# Altium PCB Bucaneve_single_board.PcbDoc (part 2 of 2)
Units mm, origin at the board's own origin, x right, y up, seen from the top; angles counter-clockwise.
Board outline 64 x 64 mm, 4 copper layers (Top Layer, Mid-Layer 1, Mid-Layer 2, Bottom Layer), stack 2.772 mm thick; 84 components, 52 nets, 236 pads, 132 vias.
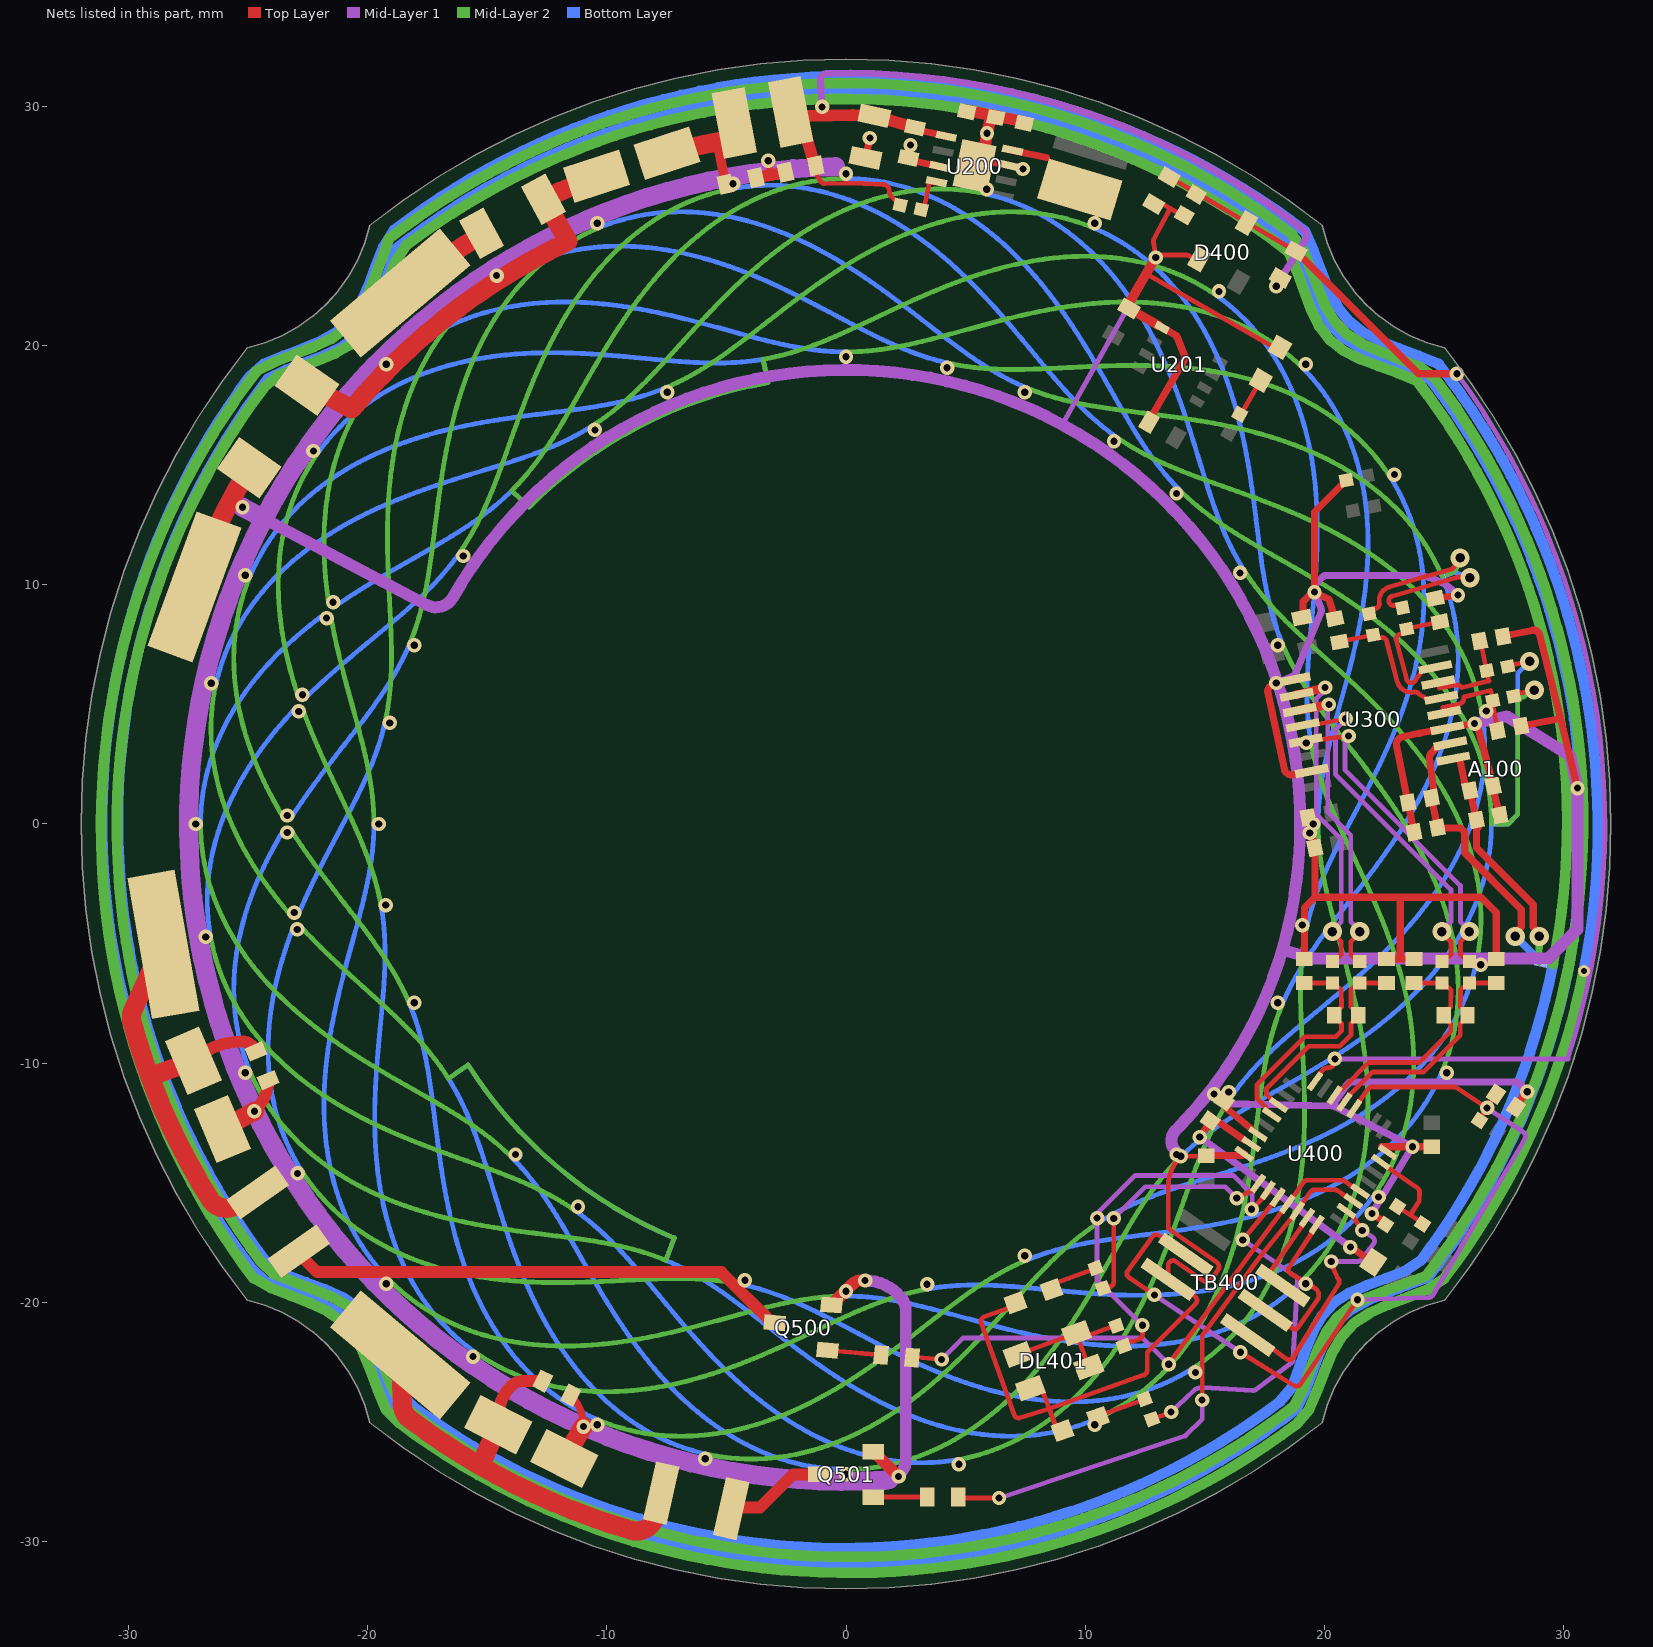
[diagram p4: the nets of this part, all layers, seen from the top]

## Via types
v1: diameter 0.6, hole 0.3, Mid-Layer 2 to Bottom Layer, tented both sides, 66 vias
v2: diameter 0.6, hole 0.3, Top Layer to Mid-Layer 1, tented both sides, 54 vias
v3: diameter 0.8, hole 0.4, Top Layer to Bottom Layer, tented both sides, 6 vias
v4: diameter 0.8, hole 0.4, Top Layer to Mid-Layer 1, tented both sides, 4 vias
v5: diameter 0.5, hole 0.25, Mid-Layer 2 to Bottom Layer, tented both sides, 1 vias
v6: diameter 0.6, hole 0.3, Top Layer to Mid-Layer 1, 1 vias

## Nets (pads, with @x,y where several pads share a name; then routed paths per layer and width w, separated by ;. In a path a pad name is that pad's centre, name@x,y a point inside that pad or via, vN(x,y) a via of type N, cw(c..) or ccw(c..) an arc to the next point about the centre after c; other vN are vias at no path point) (continued)
BOOT0: R400.1 R402.2 U400.31 | length 4.4
  Top Layer w0.2: U400.31@22.371,-14.139 22.632,-14.341 23.91,-15.236 cw(c23.795,-15.4) 23.995,-15.408 ; R402.2@23.075,-16.001 23.219,-16.1 23.604,-16.357 ; 23.995,-15.409 23.978,-15.786 23.604,-16.357 ; R400.1@24.125,-16.726 23.989,-16.615 23.604,-16.357
Buck_SW: L200.1 U200.8 | length 1.4
  Top Layer w0.3: U200.8@6.971,28.185 8.376,27.886
Buck_Vin: C201.1 C202.1 C203.1 L201.2 R200.2 R406.2 U200.1 | length 39.5
  Top Layer w0.2: C201.1@-1.264,27.428 -1.241,27.233 ccw(c-0.445,27.428) -1.024,26.849 ccw(c-0.875,26.998) -0.868,26.787 cw(c0.028,2.795) 1.548,26.756 cw(c1.53,26.472) 1.549,26.756 cw(c1.53,26.472) 1.814,26.472 ccw(c2.134,26.472) 1.814,26.471 ccw(c2.134,26.472) 1.907,26.246 R200.2@2.26,25.894
  Top Layer w0.3: C203.1@2.914,29.047 U200.1@4.193,28.775
  Top Layer w0.5: L201.2@-2.463,29.552 cw(c0,0) C202.1@1.187,29.63 C203.1@2.885,29.136 ; L201.2@-2.316,29.789 -2.179,29.574 -1.655,28.746 -1.344,27.671 C201.1@-1.264,27.535 C201.1@-1.264,27.428
  Mid-Layer 1 w0.3: v2(-1,30) -1.073,31.082 -1.073,31.084 cw(c-0.773,31.103) -1.073,31.103 cw(c-0.773,31.103) -0.782,31.402 cw(c-0.001,0.154) 19.157,24.854 cw(c18.972,24.617) 19.227,24.459 v2(18,22.5)
COS_FILT_N: C303.1 C306.1 R302.2 U400.6 | length 9.6
  Top Layer w0.2: U400.6@20.442,-11.341 20.442,-11.333 20.679,-11.097 20.752,-11.097 21.876,-9.973 23.998,-9.973 25.3,-8.671 25.3,-8.35 25,-8.05 C303.1@25,-8 25,-7.95 25.3,-7.65 25.3,-7.257 25.305,-7.252 25.305,-6.942 25.188,-6.825 25.107,-6.825 R302.2@24.932,-6.65 ; C306.1@23.761,-6.65 R302.2@24.932,-6.65
COS_FILT_P: C303.2 C305.1 R300.2 U400.5 | length 9.8
  Top Layer w0.2: U400.5@20.852,-11.628 20.852,-11.562 22.041,-10.373 24.164,-10.373 25.7,-8.837 25.7,-8.35 26,-8.05 C303.2@26,-8 26,-7.95 25.7,-7.65 25.7,-7.423 25.705,-7.418 25.705,-6.942 25.822,-6.825 25.904,-6.825 R300.2@26.079,-6.65 ; R300.2@26.079,-6.65 C305.1@27.2,-6.65
COS_N: R302.1 U300.12 | length 14.6
  Top Layer w0.2: U300.12@19.111,4.133 19.717,4.174 v2(20.9,4.4) ; R302.1@24.932,-5.75 25.107,-5.575 25.188,-5.575 25.305,-5.458 25.305,-4.917 24.932,-4.544 v4(24.932,-4.5)
  Mid-Layer 1 w0.2: v2(20.9,4.4) 20.9,4.366 20.477,3.943 20.477,2.087 25.305,-2.742 25.305,-4.083 24.932,-4.456 v4(24.932,-4.5)
COS_P: R300.1 U300.13 | length 13.8
  Top Layer w0.2: U300.13@19.238,3.495 19.843,3.537 v2(21.025,3.684) ; R300.1@26.079,-5.75 25.904,-5.575 25.822,-5.575 25.705,-5.458 25.705,-4.917 26.079,-4.544 v4(26.079,-4.5)
  Mid-Layer 1 w0.2: v2(21.025,3.684) 21.025,3.576 20.877,3.427 20.877,2.253 25.705,-2.576 25.705,-4.083 26.079,-4.456 v4(26.079,-4.5)
DBG_LED1: R404.2 U400.19 | length 16
  Top Layer w0.2: R404.2@11.619,-21.842 11.765,-21.731 12.268,-21.548 ; 12.269,-21.548 ccw(c12.2,-21.36) 12.4,-21.36 v2(12.4,-20.973) ; v2(16.97,-16.116) 17.649,-15.437 U400.19@17.649,-15.33
  Mid-Layer 1 w0.2: v2(12.4,-20.973) 10.5,-19.073 10.5,-16.3 12.1,-14.7 16.2,-14.7 17,-15.5 17,-16.085 v2(16.97,-16.116)
DBG_LED2: R405.2 U400.18 | length 10.2
  Top Layer w0.2: R405.2@10.754,-19.423 10.931,-19.398 11.068,-19.348 ; 11.069,-19.348 ccw(c11,-19.16) 11.2,-19.16 v2(11.2,-16.5) ; v2(16.347,-15.653) 17.029,-15.299 U400.18@17.239,-15.043
  Mid-Layer 1 w0.2: v2(11.2,-16.5) 12.527,-15.173 15.867,-15.173 v2(16.347,-15.653)
ERR_LED: R403.2 U400.20 | length 15.3
  Top Layer w0.2: R403.2@12.8,-24.9 12.962,-24.832 v2(13.6,-24.6) ; v2(16.6,-17.4) 17.377,-16.45 17.848,-15.873 U400.20@18.058,-15.617
  Mid-Layer 1 w0.2: v2(13.6,-24.6) 14.539,-23.716 cw(c14.9,-24.1) 14.931,-23.574 17.027,-23.696 ; v2(16.6,-17.4) 18.808,-18.936 cw(c18.694,-19.1) 18.894,-19.111 18.705,-22.407 cw(c18.506,-22.396) 18.626,-22.556 17.159,-23.656 cw(c17.039,-23.496) 17.028,-23.696
GND: C200.2 C201.2 C202.2 C203.2 C204.2 C205.2 C206.2 C207.2 C208.2 C300.2 C301.2 C302.2 C305.2 C306.2 C307.2 C308.2 C309.2 C310.2 C311.2 C312.2 C313.2 C314.2 C315.2 C316.2 C400.2 C401.2 C402.2 C403.2 C404.2 C500.2 C501.2 D201.2 D400.1 D500.2 D501.2 DL200.1 DL400.1 DL401.1 DL402.1 Q500.2 Q501.2 R309.1 R402.1 R407.1 TB400.5 TP101.1 U200.3 U200.7 U200.9 U201.5 U201.9 U300.3 U300.9 U300.15 U400.14 U400.16 U400.32 U400.33 | length 374.5
  Top Layer w0.2: DL402.1@7.085,-20.024 6.842,-20.232 5.782,-20.618 ccw(c5.85,-20.806) 5.662,-20.872 7.035,-24.719 ccw(c7.224,-24.651) 7.283,-24.842 8.5,-24.458 ; DL401.1@7.711,-23.604 8.236,-23.732 8.5,-24.458 ; DL400.1@9.048,-25.374 8.765,-25.184 8.5,-24.458 ; 12.564,23.021 17.848,19.97 DL200.1@18.15,19.943 ; R407.1@12.875,25.937 13.228,25.949 13.57,25.752 ; 12.883,24.484 ccw(c13.059,24.389) 12.861,24.362 v6(12.956,23.7) cw(c13.13,23.6) 13.129,23.8 14.246,23.8 cw(c14.246,23.6) 14.346,23.773 ; 12.883,24.485 13.57,25.752 ; TB400.5@13.775,-19.344 TB400.5@13.48,-19.048 ; C404.2@14.15,25.467 13.912,25.555 13.57,25.752 ; 14.346,23.773 14.537,23.663 D400.1@14.777,23.629 ; C402.2@15.075,-13.875 14.825,-13.898 v2(14.008,-13.898) ccw(c15.282,-15.173) 13.48,-15.173 13.48,-16.811 ccw(c13.68,-16.811) 13.564,-16.975 15.506,-18.334 cw(c15.375,-18.52) 15.561,-18.65 15.275,-19.06 cw(c15.089,-18.93) 14.958,-19.115 13.794,-18.3 ccw(c13.68,-18.464) 13.48,-18.464 TB400.5@13.48,-19.048 ; C401.2@15.812,-11.59 C401.2@15.902,-11.898 ; U400.14@16.979,-12.774 U400.14@17.235,-12.984 ; 8.5,-24.458 12.467,-23.047 ccw(c12.4,-22.859) 12.6,-22.859 12.6,-22.183 cw(c12.8,-22.183) 12.659,-22.041 14.625,-20.075 ccw(c14.483,-19.934) 14.598,-19.77 14.45,-19.667 13.824,-19.267 TB400.5@13.48,-19.048
  Top Layer w0.3: C501.2@-11.521,-23.895 cw(c-12.819,-25.193) v2@-10.983,-25.193 ; v2(-3.25,27.75) -3.15,27.15 ; C202.2@0.824,27.867 v2(1,28.7) v2@1.003,28.709 ; C203.2@2.615,27.864 2.647,27.896 2.647,28.347 v2(2.7,28.4) ; C203.2@2.643,27.776 U200.3@3.923,27.504 ; U200.9@5.646,27.784 U200.7@6.836,27.549 ; C207.2@12.674,16.815 12.806,17.085 14.151,19.416 ccw(c13.978,19.516) 14.164,19.59 13.829,20.427 ; U201.5@13.052,20.869 13.227,20.772 13.358,20.7 13.829,20.428 ; C402.2@15.075,-13.875 16.589,-13.875 U400.16@16.661,-13.803 ; C401.2@15.902,-11.898 U400.14@16.979,-12.774 ; 17.649,5.472 18.338,2.287 ccw(c18.631,2.352) 18.689,2.058 18.951,2.11 U300.15@19.491,2.22 ; 17.649,5.473 cw(c17.942,5.536) 17.808,5.804 v2(18,5.9) ; C302.2@19.073,8.638 19.119,8.683 19.119,9.3 19.519,9.7 v2(19.6,9.7) ; C308.2@19.175,-5.65 19.175,-3.51 19.619,-3.066 ; C301.2@19.335,0.277 19.472,-0.359 19.472,-0.361 C300.2@19.61,-0.998 19.619,-1.007 19.619,-3.066 ; C315.2@20.452,8.59 20.2,9.4 v2(19.6,9.7) ; R309.1@20.934,14.387 19.6,13.054 v2(19.6,9.7) ; v2(22,-16.3) 22.501,-16.635 R402.1@22.575,-16.749 ; U400.33@22.412,-13.496 22.416,-13.5 23.5,-13.5 C403.2@24.5,-13.5 ; C307.2@22.614,-5.65 23.187,-5.65 ; C311.2@23.51,0.902 23.471,1.099 23.035,3.286 cw(c23.33,3.344) 23.265,3.637 23.997,3.799 cw(c24.062,3.506) 24.002,3.8 24.606,3.921 U300.3@25.151,4.009 25.696,4.1 26.111,4.182 cw(c26.17,3.888) 26.46,3.964 27.028,1.788 C310.2@27.079,1.594 27.087,1.391 27.303,0.563 C309.2@27.354,0.369 ; C311.2@23.51,0.902 23.55,0.707 23.721,-0.151 C312.2@23.76,-0.348 ; C306.2@23.761,-5.65 23.187,-5.65 ; C316.2@24.652,9.44 v2(25.6,9.576) ; C305.2@27.2,-5.65 27.2,-3.7 26.566,-3.066 23.14,-3.066 ; C314.2@27.49,7.848 27.635,7.888 28.712,8.102 28.835,8.102 28.879,8.09 29.013,7.955 29.882,4.42 ; C400.2@28.031,-11.856 28.141,-11.688 28.233,-11.55 ccw(c27.984,-11.383) 28.279,-11.437 ; C313.2@28.24,4.098 28.388,4.123 29.882,4.42 ; 28.279,-11.436 cw(c28.574,-11.491) v2(28.5,-11.2) ; v2(30.6,1.5) 29.882,4.42 ; 19.619,-3.066 23.14,-3.066 ; 23.14,-3.066 23.187,-3.113 23.187,-5.65
  Top Layer w0.4: C206.2@11.969,21.494 11.927,21.603 11.854,21.791 12.564,23.021 v6(12.956,23.7) ; C206.2@12.099,21.419 U201.5@13.052,20.869
  Top Layer w0.5: v2(-24.75,-12.018) -24.69,-11.959 ccw(c-25.938,-10.71) C500.2@-24.173,-10.71 ; v2(-10.983,-25.211) v2@-10.983,-25.193 ; C200.2@-3.764,27.035 -3.15,27.15 C201.2@-2.536,27.265 ; Q500.2@-0.606,-20.124 0.272,-19.246 cw(c0.625,-19.6) 0.625,-19.1 v2(0.8,-19.1) ; Q501.2@1.15,-26.256 1.156,-26.256 v2(2.2,-27.3) ; C208.2@5.062,29.852 C205.2@6.063,29.654 ; 5.828,28.465 5.914,28.897 6.053,29.599 C205.2@6.063,29.654 ; C204.2@7.253,29.419 6.275,29.613 C205.2@6.063,29.654
  Top Layer w0.8: TP101.1@-27.251,9.919 -26.342,12.355 cw(c3.719,-2.221) -25.174,14.551 D201.2@-24.966,14.905 ; D500.2@-26.089,-12.758 v2(-24.75,-12.018) ; D501.2@-11.785,-26.543 v2(-10.983,-25.211)
  Mid-Layer 1 w0.2: 9.048,16.704 v6(12.956,23.7)
  Mid-Layer 1 w0.3: v2(15.4,-11.3) 15.821,-11.637 ; 15.821,-11.637 ccw(c16.008,-11.402) 16.001,-11.702 20.331,-11.798 ; v2(18,5.9) 18.052,5.921 18.648,6.164 ccw(c18.534,6.442) 18.811,6.325 19.862,8.823 ccw(c19.586,8.94) 19.864,9.053 v2(19.6,9.7) 19.6,9.876 cw(c19.9,9.876) 19.687,10.087 19.913,10.313 cw(c20.124,10.1) 20.124,10.4 23.724,10.4 cw(c23.724,7.86) 25.52,9.656 v2(25.6,9.576) ; v2(22,-16.3) v2(23.7,-13.5) 20.462,-11.832 ccw(c20.324,-12.098) 20.331,-11.798 ; v2(28.5,-11.2) 28.1,-10.8 21.073,-10.8 20.946,-10.927 20.359,-11.759 20.331,-11.798
  Mid-Layer 1 w0.5: -24.353,12.775 -17.521,9.158 ccw(c-17.147,9.865) -17.068,9.069 ccw(c-17.165,10.041) -17.053,9.071 ccw(c-17.146,9.865) -16.451,9.468 cw(c-0.16,0.203) -16.45,9.47 cw(c-0.16,0.203) -11.768,14.917 cw(c-0.002,-0.003) 9.048,16.704 cw(c-0.002,-0.003) 18.052,5.921 cw(c-0.002,-0.003) 18.334,4.979 cw(c-0.002,-0.003) 18.335,4.977 cw(c0.019,0.002) 18.491,-4.357 cw(c1.189,-0.274) 14.002,-12.597 cw(c1.189,-0.274) 13.796,-12.807 ccw(c14.24,-13.249) 13.802,-13.696 v2(14.008,-13.898) ; v2(0.8,-19.1) cw(c0.8,-21.031) 2.166,-19.666 ; 1.811,-27.419 v2(2.2,-27.3) ; 2.266,-19.766 cw(c1.7,-20.331) 2.5,-20.331 2.5,-26.618 cw(c1.7,-26.618) v2@2.34,-27.098 ; 18.257,-5.252 19.558,-5.627 29.384,-5.627 30.6,-4.411 v2(30.6,1.5) 30.294,2.839 27.639,4.506 v2(26.3,4.2)
  Mid-Layer 1 w0.8: v2(-25.25,13.25) -24.353,12.775 ; -0.441,27.496 ccw(c0,0) -24.353,12.775 ; 1.811,-27.419 cw(c1.58,-26.653) 1.63,-27.452 1.627,-27.452 cw(c0,0) -24.353,12.775
  other v2: 19.4,-0.375 7.4,27.4 5.9,28.9
INT_A: R500.1 U400.21 U400.28 | length 23.6
  Top Layer w0.2: R500.1@2.765,-22.326 2.967,-22.31 v2(4,-22.4) ; v2(13.5,-22.6) 18.258,-16.16 U400.21@18.468,-15.904 18.677,-15.647 19.14,-14.985 cw(c19.304,-15.1) 19.304,-14.9 20.74,-14.9 cw(c20.74,-15.1) 20.855,-14.936 21.227,-15.197 U400.28@21.511,-15.367
  Mid-Layer 1 w0.2: v2(4,-22.4) 4.9,-21.5 12.4,-21.5 v2(13.5,-22.6)
INT_B: R501.1 U400.22 U400.27 | length 23.9
  Top Layer w0.2: R501.1@4.7,-28.156 4.9,-28.2 v2(6.4,-28.2) ; v2(14.9,-24.1) 14.9,-21.465 cw(c15.1,-21.465) 14.939,-21.347 17.207,-18.246 cw(c17.39,-18.38) 17.214,-18.237 18.668,-16.447 U400.22@18.877,-16.191 19.066,-15.92 19.44,-15.385 cw(c19.604,-15.5) 19.604,-15.3 20.44,-15.3 cw(c20.44,-15.5) 20.555,-15.336 20.941,-15.606 U400.27@21.224,-15.777
  Mid-Layer 1 w0.2: v2(6.4,-28.2) 14.2,-25.6 14.9,-24.9 v2(14.9,-24.1)
NetC200_1: C200.1 D200.1 L201.1 | length 4.9
  Top Layer w0.4: -5.4,28.6 C200.1@-5.036,26.765
  Top Layer w0.8: D200.1@-7.487,28.06 cw(c0,0) L201.1@-4.568,28.68
NetD200_2: D200.2 D201.1 F200.2 | length 18.7
  Top Layer w0.8: D201.1@-22.545,18.362 -20.683,17.355 cw(c0,0) -11.624,24.37 -12.642,26.142 cw(c0,0) D200.2@-9.924,27.29
NetDL200_2: DL200.2 R201.1 | length 1.7
  Top Layer w0.2: R201.1@16.475,17.14 16.597,17.271 17.192,18.302 DL200.2@17.35,18.557
NetDL400_2: DL400.2 R403.1 | length 2.1
  Top Layer w0.2: DL400.2@10.552,-24.826 10.814,-24.671 12.33,-24.119 R403.1@12.492,-24.054
NetDL401_2: DL401.2 R404.1 | length 5.8
  Top Layer w0.2: DL401.2@7.198,-22.195 7.621,-22.041 9.218,-21.46 DL401.2@9.641,-21.306 ; DL401.2@10.154,-22.715 10.051,-22.433 9.743,-21.588 DL401.2@9.641,-21.306 ; R404.1@11.311,-20.996 11.136,-21.028 10.149,-21.387 DL401.2@9.641,-21.306
NetDL402_2: DL402.2 R405.1 | length 2.1
  Top Layer w0.2: DL402.2@8.589,-19.476 8.805,-19.193 10.288,-18.654 R405.1@10.446,-18.577
NetF500_1: F500.1 Q500.3 | length 21.2
  Top Layer w0.5: F500.1@-22.889,-17.871 -22.889,-17.98 -22.119,-18.75 -5.214,-18.75 -3.094,-20.87 Q500.3@-2.98,-20.87
NetF501_1: F501.1 Q501.3 | length 4.2
  Top Layer w0.5: F501.1@-4.803,-28.639 -4.75,-28.587 -3.587,-28.587 -2.206,-27.206 Q501.3@-1.15,-27.206
NetQ500_1: Q500.1 R500.2 | length 2.2
  Top Layer w0.2: Q500.1@-0.772,-22.017 R500.2@1.47,-22.213
NetQ501_1: Q501.1 R501.2 | length 2.3
  Top Layer w0.2: Q501.1@1.15,-28.156 R501.2@3.4,-28.156
NetR200_1: R200.1 U200.4 | length 1.6
  Top Layer w0.2: R200.1@3.27,25.807 U200.4@3.507,26.918
  Top Layer w0.3: R200.1@3.14,25.706 R200.1@3.27,25.807 ; U200.4@3.507,26.918 U200.4@3.787,26.868
NRST: C400.1 R401.1 TB400.3 U400.4 | length 37.1
  Top Layer w0.2: v2(12.9,-19.7) 11.839,-18.963 11.824,-18.953 11.812,-18.94 11.753,-18.881 11.753,-18.799 11.753,-18.734 12.826,-17.249 12.895,-17.179 13.041,-17.179 13.271,-17.34 TB400.3@14.208,-18.008 ; v2(16.5,-22.1) 18.735,-23.491 ; 18.736,-23.492 ccw(c18.845,-23.324) 19.01,-23.437 v2(21.4,-19.9) ; U400.4@21.261,-11.915 21.449,-11.644 21.84,-11.085 cw(c22.004,-11.2) 22.004,-11 25.5,-11 v2(26.822,-11.876) ; R401.1@26.5,-12.4 26.578,-12.241 v2(26.822,-11.876) ; C400.1@27.2,-11.3 27.066,-11.511 v2(26.822,-11.876)
  Mid-Layer 1 w0.2: v2(12.9,-19.7) v2(16.5,-22.1) ; v2(21.4,-19.9) 24.39,-19.804 ccw(c24.383,-19.604) 24.556,-19.705 28.404,-13.163 ccw(c28.232,-13.061) 28.343,-12.895 v2(26.822,-11.876)
OUT_A: C500.1 D500.1 F500.2 TP102.1 | length 18.9
  Top Layer w0.5: D500.1@-27.298,-9.906 -26.871,-9.571 cw(c-25.274,-12.02) -25.308,-9.096 cw(c-25.302,-9.767) -24.702,-9.468 C500.1@-24.681,-9.514
  Top Layer w0.8: -29.091,-10.56 -27.653,-10.034 D500.1@-27.3,-9.904 ; TP102.1@-28.559,-5.036 -29.001,-5.988 -29.821,-7.758 ccw(c-29.095,-8.094) -29.866,-8.307 ccw(c-2.58,-0.691) -26.604,-15.703 ccw(c-25.929,-15.275) -25.518,-15.961 -25.339,-15.854 F500.2@-24.61,-15.413
OUT_B: C501.1 D501.1 F501.2 TP103.1 | length 20.4
  Top Layer w0.5: D501.1@-14.547,-25.136 -14.547,-24.82 cw(c-12.68,-24.82) -14,-23.5 cw(c-13.529,-23.971) -13.529,-23.305 C501.1@-12.679,-23.305
  Top Layer w0.8: TP103.1@-18.641,-22.215 -18.61,-23.024 -18.562,-24.295 ccw(c-17.762,-24.263) -18.246,-24.9 ccw(c-0.935,-1.954) -8.981,-29.549 cw(c-9.199,-30.319) -8.978,-29.55 ccw(c-8.76,-28.78) -8.194,-29.346 ccw(c-8.76,-28.78) -7.985,-28.981 -7.943,-28.814 F501.2@-7.731,-27.99 ; -15.25,-26.75 D501.1@-14.547,-25.136
RX_COS_FILT_N: C314.1 R303.2 U300.6 | length 4.1
  Top Layer w0.2: U300.6@24.771,5.921 24.819,5.68 25.507,5.817 cw(c25.551,5.595) 25.752,5.701 26.877,5.979 cw(c26.973,5.591) 26.894,5.983 R303.2@26.809,6.412 26.768,6.582 26.602,7.416 C314.1@26.51,7.652
RX_COS_FILT_P: C313.1 R301.2 U300.4 | length 4.2
  Top Layer w0.2: U300.4@25.024,4.646 24.976,4.887 25.665,5.024 ccw(c25.621,5.247) 25.843,5.291 25.839,5.311 26.973,5.591 R301.2@27.059,5.162 27.054,4.983 27.22,4.15 C313.1@27.26,3.902
RX_COS_N: A100.4 R303.1 | length 8.6
  Top Layer w0.2: R303.1@27.691,6.588 27.857,6.652 v3(28.6,6.8)
  Bottom Layer w0.2: A100.4@27.25,0 27.7,0 28.1,0.4 28.1,6.3 v3(28.6,6.8)
RX_COS_P: A100.3 R301.1 | length 7.6
  Top Layer w0.2: R301.1@27.941,5.338 28.095,5.46 v3(28.8,5.6)
  Mid-Layer 2 w0.2: A100.3@27.25,0 27.6,0 27.7,0 28.1,0.4 28.1,5.169 28.241,5.31 28.348,5.31 28.638,5.6 v3(28.8,5.6)
  other v1: 0,-27.2 4.723,-26.787 -15.601,-22.281 0,-19.55 3.395,-19.253 -19.233,-19.233 19.233,-19.233 -11.213,-16.014 22.281,-15.601 -13.824,-13.824 13.824,-13.824 16.014,-11.213 -26.787,-4.723 -19.253,-3.395 -27.2,0 -19.55,0 19.55,0 19.253,3.395 -22.896,4.71 26.787,4.723 -22.741,5.407 -21.73,8.614 -21.457,9.274 -16.014,11.213 13.824,13.824 -22.281,15.601 11.213,16.014 -19.233,19.233 19.233,19.233 0,19.55 15.601,22.281 -4.723,26.787 0,27.2
RX_SIN_FILT_N: C316.1 R307.2 U300.7 | length 5.3
  Top Layer w0.2: U300.7@24.644,6.559 24.069,6.365 23.866,6.094 ccw(c24.048,5.958) 23.834,6.037 cw(c23.647,6.106) 23.453,6.054 23.021,7.688 cw(c23.214,7.739) 23.176,7.935 23.318,7.964 R307.2@23.457,8.159 23.625,8.212 24.603,8.407 C316.1@24.848,8.46
RX_SIN_FILT_P: C315.1 R306.2 U300.5 | length 6
  Top Layer w0.2: C315.1@20.648,7.61 20.89,7.674 21.886,7.872 R306.2@22.057,7.909 22.263,7.771 22.387,7.796 cw(c22.426,7.6) 22.623,7.635 ccw(c23.214,7.739) 22.634,7.585 23.067,5.952 ccw(c23.647,6.106) 23.764,5.517 cw(c23.803,5.321) 23.95,5.456 ccw(c24.117,5.61) 24.001,5.415 24.292,5.242 U300.5@24.898,5.284
RX_SIN_N: A100.6 R307.1 | length 5.3
  Top Layer w0.2: R307.1@23.282,9.041 23.077,9.172 22.944,9.145 cw(c22.904,9.342) 22.849,9.534 25.438,10.277 ccw(c25.273,10.854) 25.539,10.316 cw(c25.627,10.137) 25.643,10.336 v3(26.1,10.3)
  Bottom Layer w0.2: A100.6@25.176,10.428 A100.6@25.408,10.514 ; A100.6@25.409,10.514 cw(c25.477,10.326) 25.549,10.513 v3(26.1,10.3)
RX_SIN_P: A100.5 R306.1 | length 5.8
  Top Layer w0.2: R306.1@21.882,8.791 22.021,8.991 22.154,9.017 ccw(c22.115,9.213) 22.312,9.245 cw(c22.904,9.342) 22.739,9.918 25.328,10.662 ccw(c25.273,10.854) 25.441,10.746 v3(25.689,11.131)
  Mid-Layer 2 w0.2: A100.5@25.176,10.428 25.431,10.564 ccw(c25.338,10.74) 25.526,10.673 v3(25.689,11.131)
  other v1: -5.887,-26.555 -10.409,-25.13 10.409,-25.13 14.615,-22.94 -4.231,-19.087 7.481,-18.062 10.504,-16.488 -22.94,-14.615 -25.13,-10.409 25.13,-10.409 -18.062,-7.481 18.062,-7.481 26.555,-5.887 -22.955,-4.41 19.087,-4.231 -23.079,-3.707 -23.372,-0.357 -23.372,0.357 -19.087,4.231 -26.555,5.887 -18.062,7.481 18.062,7.481 -25.13,10.409 16.488,10.504 22.94,14.615 -10.504,16.488 -7.481,18.062 7.481,18.062 4.231,19.087 -14.615,22.94 -10.409,25.13 10.409,25.13 5.887,26.555
SIN_FILT_N: C304.1 C308.1 R305.2 U400.12 | length 9.6
  Top Layer w0.2: U400.12@17.808,-12.164 17.801,-12.164 17.564,-11.928 17.564,-11.855 17.191,-11.481 17.191,-10.904 19.195,-8.9 20.496,-8.9 20.725,-8.671 20.725,-8.35 20.425,-8.05 C304.1@20.425,-8 20.425,-7.95 20.725,-7.65 20.725,-7.319 20.719,-7.313 20.719,-6.942 20.602,-6.825 20.521,-6.825 R305.2@20.346,-6.65 C308.1@19.175,-6.65
SIN_FILT_P: C304.2 C307.1 R304.2 U400.11 | length 9.2
  Top Layer w0.2: U400.11@18.095,-11.755 18.03,-11.755 17.591,-11.316 17.591,-11.07 19.361,-9.3 20.662,-9.3 21.125,-8.837 21.125,-8.35 21.425,-8.05 C304.2@21.425,-8 21.425,-7.95 21.125,-7.65 21.125,-7.153 21.119,-7.148 21.119,-6.942 21.237,-6.825 21.318,-6.825 R304.2@21.493,-6.65 C307.1@22.614,-6.65
SIN_N: R305.1 U300.10 | length 13.8
  Top Layer w0.2: R305.1@20.346,-5.75 20.521,-5.575 20.602,-5.575 20.719,-5.458 20.719,-5.087 20.72,-4.917 20.346,-4.544 v4(20.346,-4.5)
  Top Layer w0.381: U300.10@18.857,5.408 v2(20.043,5.71)
  Mid-Layer 1 w0.2: v2(20.043,5.71) 20.043,5.602 19.673,5.232 19.673,0.404 20.72,-0.642 20.72,-4.083 20.346,-4.456 v4(20.346,-4.5)
SIN_P: R304.1 U300.11 | length 12.9
  Top Layer w0.2: R304.1@21.493,-5.75 21.318,-5.575 21.237,-5.575 21.119,-5.458 21.119,-5.252 21.12,-4.917 21.493,-4.544 v4(21.493,-4.5)
  Top Layer w0.381: U300.11@18.984,4.77 v2(20.2,5)
  Mid-Layer 1 w0.2: v2(20.2,5) 20.15,4.95 20.15,0.493 21.12,-0.477 21.12,-4.083 21.493,-4.456 v4(21.493,-4.5)
SWCLK: TB400.4 U400.24 | length 7.2
  Top Layer w0.2: TB400.4@17.542,-20.342 18.495,-20.986 18.696,-21.127 18.842,-21.127 18.913,-21.057 19.712,-19.925 ccw(c19.413,-19.714) 19.6,-19.4 18.59,-18.794 18.573,-18.777 18.514,-18.718 18.514,-18.635 18.514,-18.575 18.548,-18.525 19.528,-17.049 U400.24@19.697,-16.764
SWDIO: TB400.2 U400.23 | length 3.5
  Top Layer w0.2: TB400.2@18.27,-19.302 17.732,-18.742 19.118,-16.762 U400.23@19.287,-16.477
SWO: TB400.6 U400.26 | length 10.8
  Top Layer w0.2: TB400.6@16.814,-21.383 17.818,-21.953 18.426,-22.378 ; 18.427,-22.379 ccw(c18.541,-22.215) 18.711,-22.32 20.607,-19.251 ccw(c20.437,-19.146) 20.562,-18.989 v2@20.3,-18.4 ; U400.26@20.937,-16.186 21.193,-16.396 v2(21.6,-17)
  Mid-Layer 1 w0.2: v2(20.3,-18.3) 21.402,-18.3 ccw(c21.402,-18.1) 21.56,-18.223 22.068,-17.57 ccw(c21.91,-17.447) 22.021,-17.281 v2(21.6,-17)
TX_N: A100.2 C311.1 C312.1 U300.2 | length 12.1
  Top Layer w0.3: C312.1@24.74,-0.152 C312.1@24.745,-0.157 ; U300.2@25.247,3.363 24.742,3.237 24.481,2.961 ccw(c24.682,2.771) 24.407,2.734 24.598,1.323 C311.1@24.49,1.098 24.744,-0.152 C312.1@24.745,-0.157 ; v3(28,-4.7) 28,-4.565 28.25,-4.315 28.25,-3.572 25.883,-1.205 25.883,-0.338 25.707,-0.162 24.75,-0.162 C312.1@24.745,-0.157
  Bottom Layer w0.3: v3(28,-4.7) A100.2@28.919,-5.619
TX_P: A100.1 C309.1 C310.1 U300.1 | length 10
  Top Layer w0.3: U300.1@25.405,2.734 25.675,2.759 25.912,1.565 C310.1@26.098,1.399 ; C310.1@26.108,1.368 26.376,0.174 26.448,-0.147 26.383,-0.209 26.383,-0.997 28.75,-3.365 28.75,-4.315 29,-4.565 v3(29,-4.7)
  Mid-Layer 2 w0.3: A100.1@28.985,-5.767 v3(29,-4.7)
  other v5: 30.87,-6.14
V_SUPPLY: F200.1 TP100.1 | length 4.2
  Top Layer w0.8: TP100.1@-18.641,22.215 cw(c0,0) F200.1@-15.252,24.665
V_supply_sense: C404.1 D400.3 R406.1 R407.2 U400.8 | length 56.2
  Top Layer w0.2: R407.2@13.525,27.063 14.681,26.387 16.763,25.169 R406.1@18.825,23.963 ; U400.8@19.623,-10.767 19.911,-10.334 ; 19.911,-10.333 cw(c20.161,-10.5) 20.161,-10.2 ccw(c20.16,-9.9) v2(20.451,-9.827)
  Top Layer w0.3: R406.1@18.825,23.963 23.952,18.836 v2(25.556,18.836)
  Mid-Layer 1 w0.2: v2(20.451,-9.827) 30.2,-9.827 ; v2(25.556,18.836) cw(c-0.002,-0.003) 30.2,-9.8
VDDA_MCU: C401.1 FB401.2 U400.15 | length 11.5
  Top Layer w0.2: U400.15@16.663,-13.224 U400.15@16.948,-13.393
  Top Layer w0.3: v2(14.8,-13.1) 15.154,-12.595 C401.1@15.238,-12.41 ; C401.1@15.529,-12.43 U400.15@16.663,-13.224 ; v2(21.1,-17.7) 21.809,-18.174 FB401.2@22.06,-18.339
  Mid-Layer 1 w0.3: v2(14.8,-13.1) v2(21.1,-17.7)
pads on no net: U200.2 U200.6 U201.2 U201.3 U201.4 U201.6 U400.2 U400.3 U400.7 U400.9 U400.10 U400.13 U400.25 U400.29 U400.30

## Polygon pours and split planes (outlines as drawn)
Buck_SW on Top Layer "NONET_L-01_P-001" (solid, pour order 0): 8.079,28.105 7.7,26.402 7.925,26.075 11.275,25.05 11.85,27 8.35,28.025
5V on Top Layer "NONET_L-01_P-001" (solid, pour order 1): 10.858,29.776 12.453,28.968 11.918,27.154 7.887,28.387 8.36,30.517
GND on Mid-Layer 1 "NONET_L-01_P-001" (solid, pour order 2): -0.471,26.996 cw(c0,0) 10.982,24.666 12.65,28.411 ccw(c0,0) -0.543,31.095

## Silkscreen, mask and mechanical layers (free items; w line width, h text height)
Top Overlay:
  lines w0.1: 21.275,-0.2 22.09,-1.3 26.472,-1.3 28.2,-3 ; 25.5,-0.3 25.8,-0.7 26.138,-0.885 27.4,-1
  text "+" at -17.169,19.253 h2 r2.5
  text "-" at -24.032,8.293 h2
  text "A" at -24.984,-5.227 h2
  text "B" at -16.312,-19.517 h2
Bottom Overlay:
  drawing of 11 lines, arcs and shapes, not listed
  text "+" at -15.8,24.033 h1
Board Shape:
  circle w0.5: c0,0 r18.1
  lines w0.5: -32,0 -31.95,1.792 -31.799,3.578 -31.549,5.354 -31.2,7.112 -30.752,8.848 -30.209,10.556 -29.57,12.232 -28.839,13.868 -28.017,15.462 -27.107,17.006 -26.112,18.498 -25.035,19.931 -24.303,20.14 -23.599,20.429 -22.932,20.797 -22.311,21.237 -21.744,21.744 -21.237,22.311 -20.797,22.932 -20.43,23.599 -20.14,24.303 -19.931,25.035 -18.498,26.112 -17.006,27.107 -15.462,28.017 -13.868,28.839 -12.232,29.57 -10.557,30.209 -8.848,30.752 -7.112,31.2 -5.354,31.549 -3.579,31.799 -1.792,31.95 0,32 1.792,31.95 3.578,31.799 5.354,31.549 7.112,31.2 8.848,30.752 10.556,30.209 12.232,29.57 13.868,28.839 15.462,28.017 17.006,27.107 18.498,26.112 19.931,25.035 20.14,24.303 20.429,23.599 20.797,22.932 21.237,22.311 21.744,21.744 22.311,21.237 22.932,20.797 23.599,20.429 24.303,20.14 25.035,19.931 26.112,18.498 27.107,17.006 28.017,15.462 28.839,13.868 29.57,12.232 30.209,10.556 30.752,8.848 31.2,7.112 31.549,5.354 31.799,3.578 31.95,1.792 32,0 31.95,-1.792 31.799,-3.579 31.549,-5.354 31.2,-7.112 30.752,-8.848 30.209,-10.557 29.57,-12.232 28.839,-13.868 28.017,-15.462 27.107,-17.006 26.112,-18.498 25.035,-19.931 24.303,-20.14 23.599,-20.43 22.932,-20.797 22.311,-21.237 21.744,-21.744 21.237,-22.311 20.797,-22.932 20.429,-23.599 20.14,-24.303 19.931,-25.035 18.498,-26.112 17.006,-27.107 15.462,-28.017 13.868,-28.839 12.232,-29.57 10.556,-30.209 8.848,-30.752 7.112,-31.2 5.354,-31.549 3.578,-31.799 1.792,-31.95 0,-32 -1.792,-31.95 -3.579,-31.799 -5.354,-31.549 -7.112,-31.2 -8.848,-30.752 -10.557,-30.209 -12.232,-29.57 -13.868,-28.839 -15.462,-28.017 -17.006,-27.107 -18.498,-26.112 -19.931,-25.035 -20.14,-24.303 -20.43,-23.599 -20.797,-22.932 -21.237,-22.311 -21.744,-21.744 -22.311,-21.237 -22.932,-20.797 -23.599,-20.43 -24.303,-20.14 -25.035,-19.931 -26.112,-18.498 -27.107,-17.006 -28.017,-15.462 -28.839,-13.868 -29.57,-12.232 -30.209,-10.557 -30.752,-8.848 -31.2,-7.112 -31.549,-5.354 -31.799,-3.579 -31.95,-1.792 -32,0
Drill Drawing:
  lines w0.254: -153.217,53.387 -152.793,53.387 -152.37,52.964 -151.947,53.387 -151.523,53.387 -151.947,53.81 -151.523,54.234 -151.947,54.234 -152.37,54.657 -152.793,54.234 -153.217,54.234 -152.793,53.81 -153.217,53.387 ; -153.217,56.774 -151.523,56.774 -151.523,58.467 -153.217,58.467 -153.217,56.774 ; -153.217,62.277 -151.523,62.277 -152.37,60.584 -153.217,62.277
  lines w0.381: -154.735,51.821 175.829,51.821 ; -154.735,63.251 175.829,63.251 ; -140.743,48.011 -140.743,67.061 ; -125.761,48.011 -125.761,67.061 ; -98.083,48.011 -98.083,67.061 ; -85.234,48.011 -85.234,67.061 ; -66.595,48.011 -66.595,67.061 ; -25.714,48.011 -25.714,67.061 ; -10.731,48.011 -10.731,67.061 ; 8.212,48.011 8.212,67.061 ; 28.78,48.011 28.78,67.061 ; 50.466,48.011 50.466,67.061 ; 84.339,48.011 84.339,67.061 ; 118.213,48.011 118.213,67.061 ; 140.203,48.011 140.203,67.061 ; -154.735,48.011 175.829,48.011 175.829,67.061 -154.735,67.061 -154.735,48.011
  text "Symbol" at -152.449,64.394 h1.83
  text "Count" at -139.6,64.394 h1.83
  text "Hole Size" at -124.618,64.394 h1.83
  text "Plated" at -96.94,64.394 h1.83
  text "Hole Type" at -84.091,64.394 h1.83
  text "Drill Layer Pair" at -65.452,64.394 h1.83
  text "Via/Pad" at -24.571,64.394 h1.83
  text "Pad Shape" at -9.588,64.394 h1.83
  text "Template" at 9.355,64.394 h1.83
  text "Description" at 29.923,64.394 h1.83
  text "Hole Tolerance (+)" at 51.609,64.394 h1.83
  text "Hole Tolerance (-)" at 85.482,64.394 h1.83
  text "Hole Length" at 119.356,64.394 h1.83
  text "Routed Path Length" at 141.346,64.394 h1.83
  text "1" at -139.6,60.584 h1.52
  text "0.250mm (9.84mil)" at -124.618,60.584 h1.52
  text "PTH" at -96.94,60.584 h1.52
  text "Round" at -84.091,60.584 h1.52
  text "Mid-Layer 2 - Bottom Layer" at -65.452,60.584 h1.52
  text "Via" at -24.571,60.584 h1.52
  text "Rounded" at -9.588,60.584 h1.52
  text "v50h25m50mx0" at 9.355,60.584 h1.52
  text "-" at 119.356,60.584 h1.52
  text "-" at 141.346,60.584 h1.52
  text "10" at -139.6,56.774 h1.52
  text "0.400mm (15.75mil)" at -124.618,56.774 h1.52
  text "PTH" at -96.94,56.774 h1.52
  text "Round" at -84.091,56.774 h1.52
  text "(Mixed)" at -65.452,56.774 h1.52
  text "Via" at -24.571,56.774 h1.52
  text "Rounded" at -9.588,56.774 h1.52
  text "(Mixed)" at 9.355,56.774 h1.52
  text "-" at 119.356,56.774 h1.52
  text "-" at 141.346,56.774 h1.52
  text "121" at -139.6,52.964 h1.52
  text "0.300mm (11.81mil)" at -124.618,52.964 h1.52
  text "PTH" at -96.94,52.964 h1.52
  text "Round" at -84.091,52.964 h1.52
  text "(Mixed)" at -65.452,52.964 h1.52
  text "Via" at -24.571,52.964 h1.52
  text "Rounded" at -9.588,52.964 h1.52
  text "(Mixed)" at 9.355,52.964 h1.52
  text "-" at 119.356,52.964 h1.52
  text "-" at 141.346,52.964 h1.52
  text "132 Total" at -139.6,49.154 h1.52

## Dimensions
-32,0 to 32,0 on Dimensions
-18.1,0 to 18.1,0 on Dimensions

## Text inside footprints (layer, text, board x,y; h text height)
U300: Mechanical 17 "*" at 24.445,3.632 h0.6 r191.25; Top Assembly "*" at 24.445,3.632 h0.6 r191.25